# Altium PCB RaspberryPi3_Cape_V1.0.PcbDoc
Units mm, origin at the board's own origin, x right, y up, seen from the top; angles counter-clockwise.
Board outline 69.63 x 45.49 mm, 2 copper layers (Top Layer, Bottom Layer); 67 components, 48 nets, 217 pads, 36 vias.
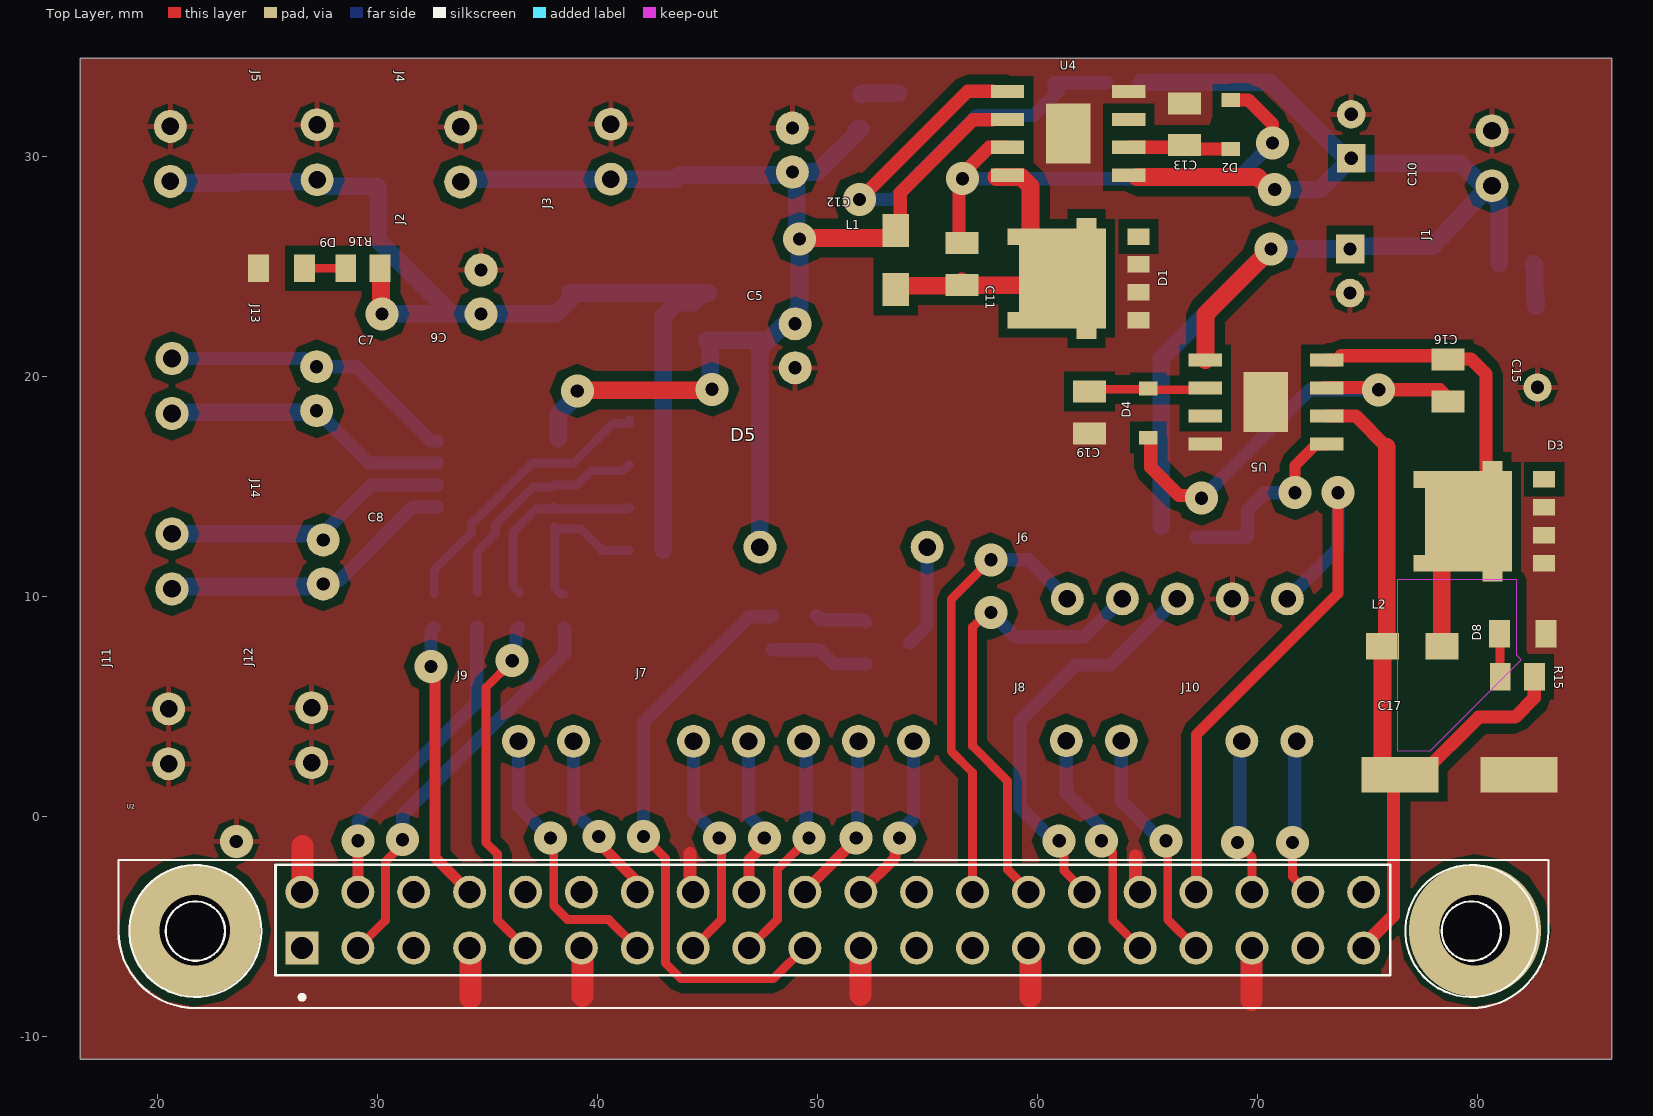
[diagram p0: Top Layer view]
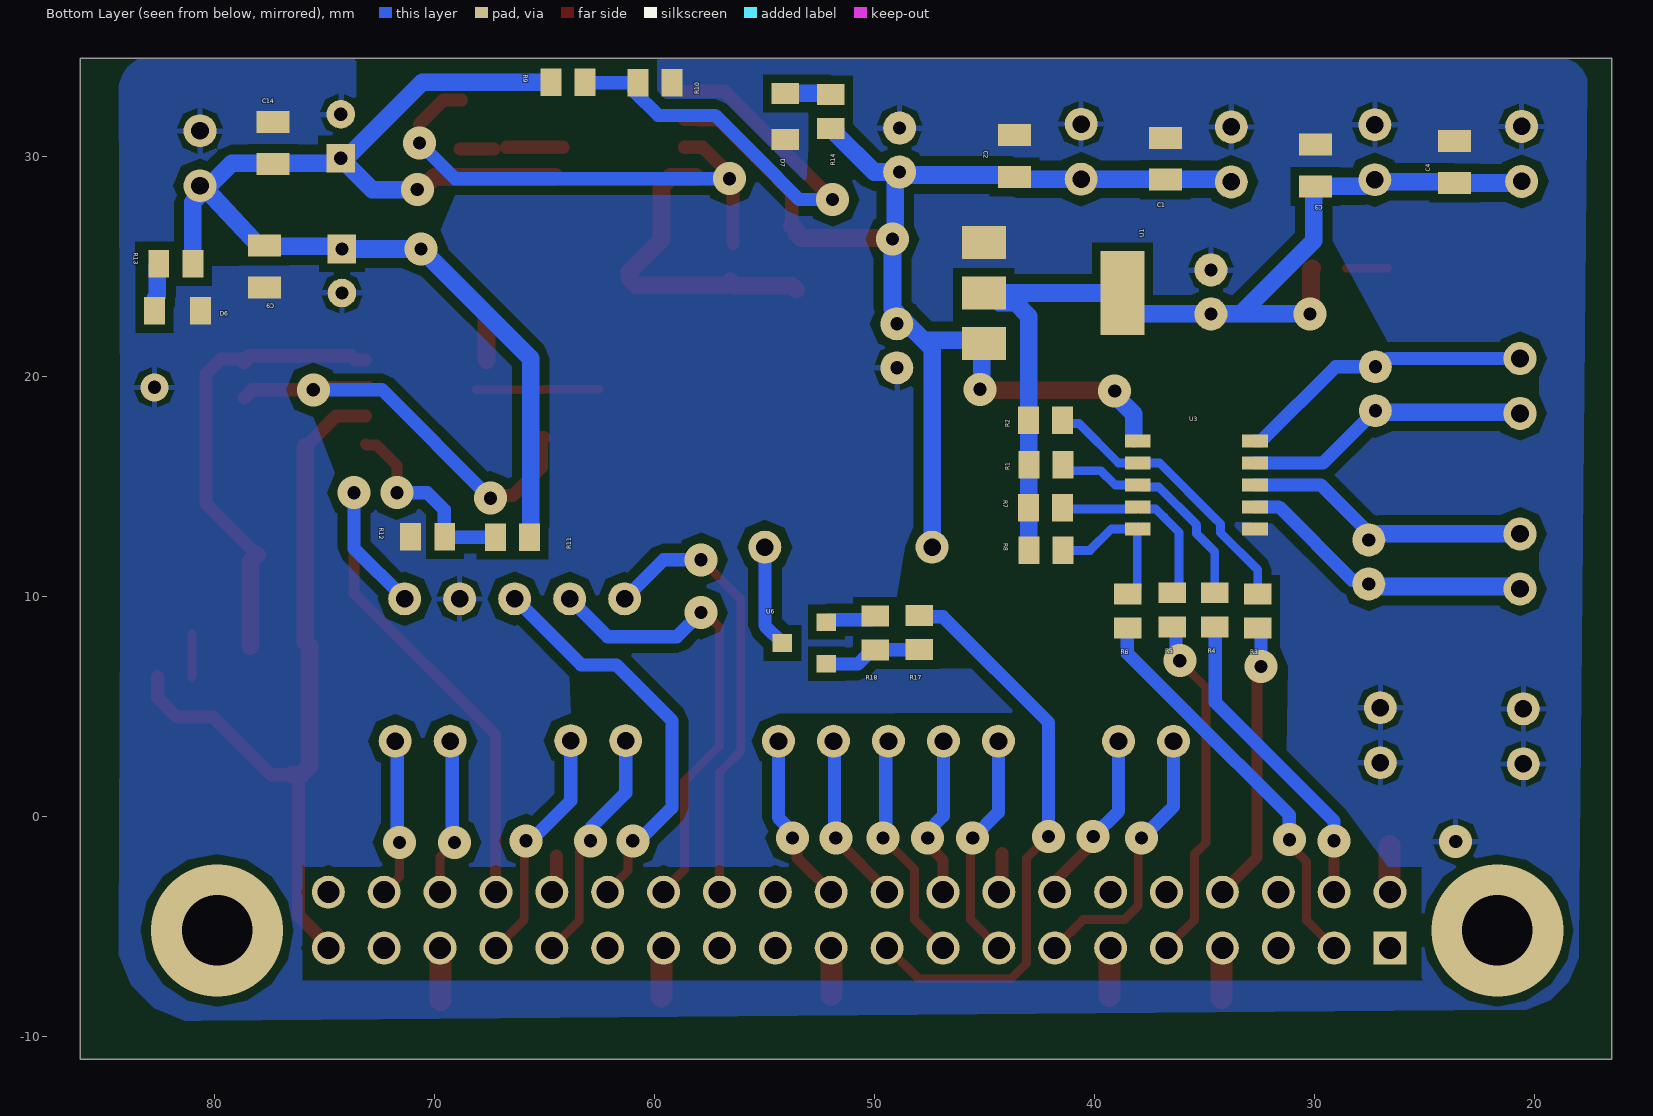
[diagram p1: Bottom Layer view, seen from below]
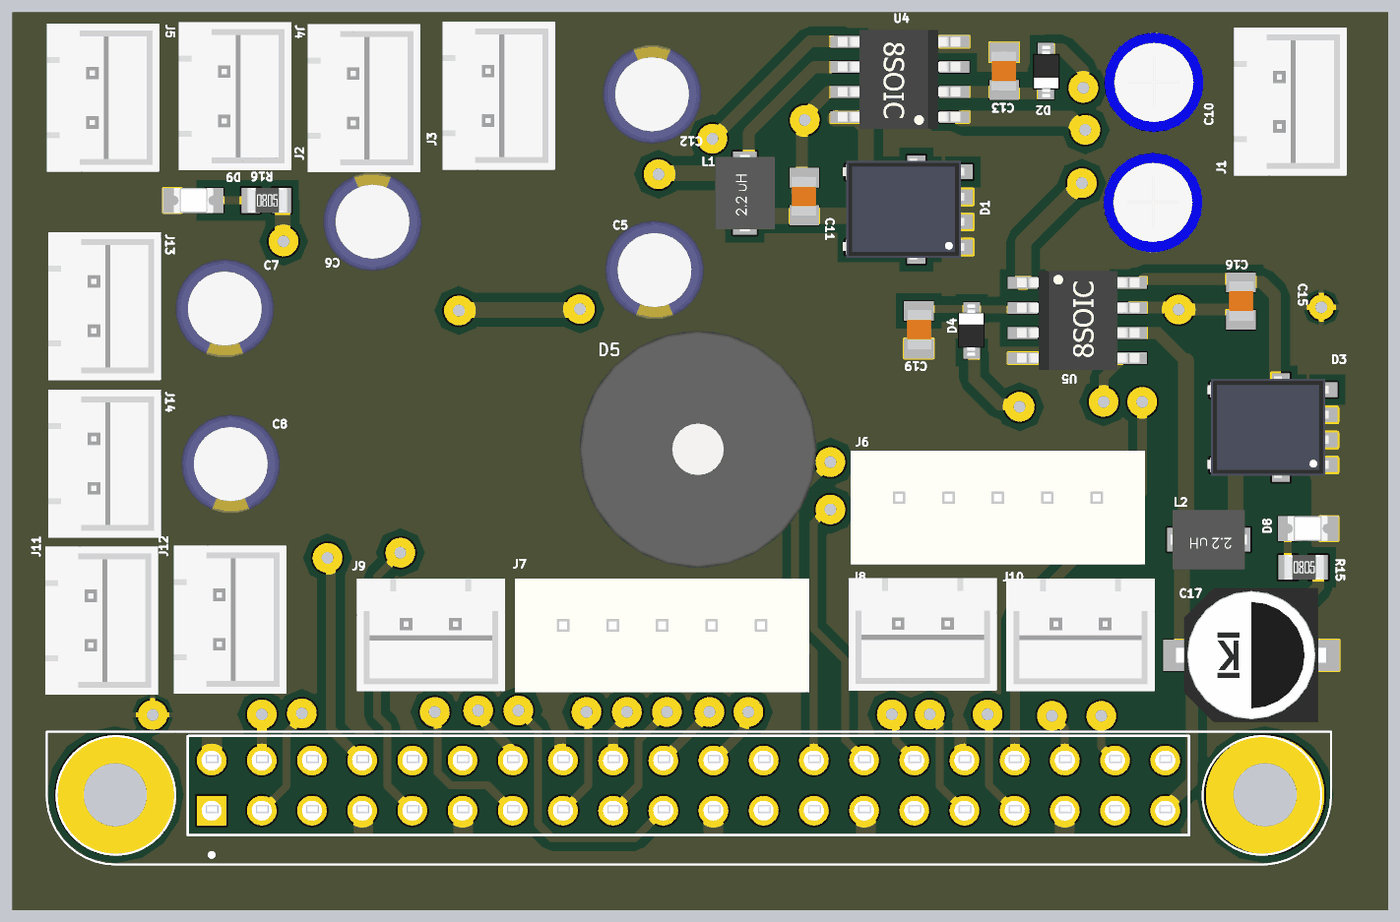
[diagram p2: 3D render of the assembled board from above, using the file's embedded part models]
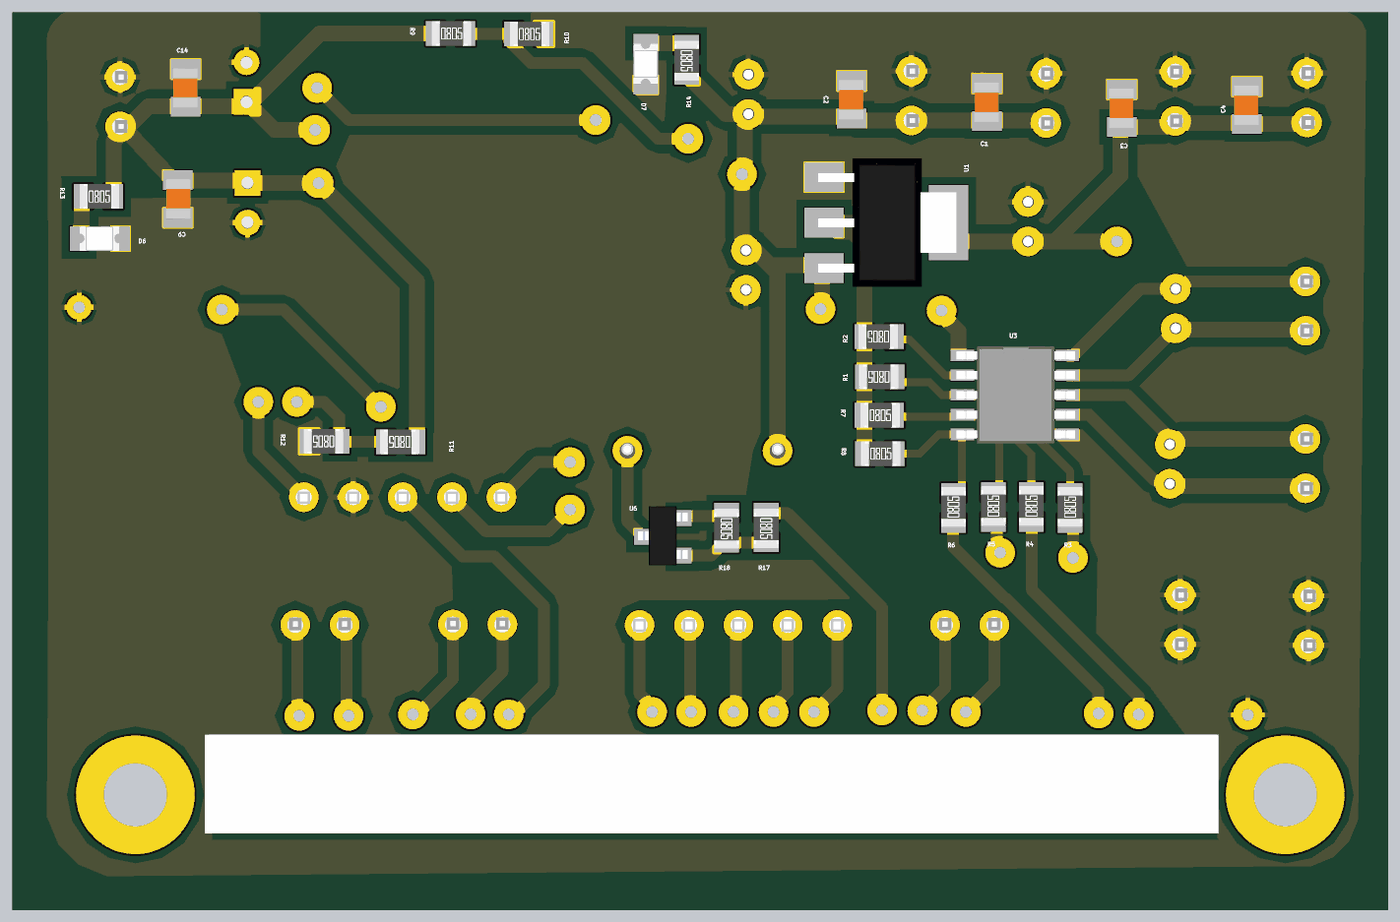
[diagram p3: 3D render of the assembled board from below, using the file's embedded part models]

## Layer stack, top to bottom
Top Solder: solder mask 0.0102, Solder Resist, Dk 3.5
Top Layer: signal copper 0.0356
Dielectric 1: dielectric 0.32, FR-4, Dk 4.8
Bottom Layer: signal copper 0.0356
Bottom Solder: solder mask 0.0102, Solder Resist, Dk 3.5

## Board outline
16.5,-11.05 16.5,34.439 25.239,34.439 86.125,34.439 86.125,-11.05

## Design rules (kind name [scope] priority, off if disabled: settings)
Clearance [All] p1: gap=0.4 ignorepadtopadclearanceinfootprint=FALSE except(0.2: Arc-Hole Track-Hole; 0.3: Arc-THPad Track-THPad)
PolygonConnect [All] p1: connectstyle=Relief reliefconductorwidth=0.254 reliefentries=4 polygonreliefangle="90 Angle" airgapwidth=0.254
RoutingVias [All] p1: holewidth=0.6 width=1.5 viastyle="Through Hole" minholewidth=0.6 minwidth=0.8 maxholewidth=10 maxwidth=10
SolderMaskExpansion [All] p1: expansion=0.102 istentingtop=FALSE
Width [All] p1: maxlimit=1 minlimit=0.254 preferedwidth=0.4 minimp=50.000000 maximp=50.000000 favimp=50.000000
30 further rules are at their usual default settings.

## Components (designator, comment, footprint, x,y, rotation, side; value= is the part's Value field where it differs from the comment)
C1 "470nF" CAP_0805 36.8,30.675 r270 bottom
C2 "470nF" CAP_0805 43.65,30.8 r270 bottom
C3 "470nF" CAP_0805 29.975,30.375 r270 bottom
C4 "470nF" CAP_0805 23.65,30.525 r270 bottom
C5 "10uF" CAP_POL_P-1.5MM 49,22.375 r270 top
C6 "10uF" CAP_POL_P-1.5MM 34.725,22.825 r90 top
C7 "100uF" CAP_POL_P-2MM 27.25,20.425 r270 top
C8 "100uF" CAP_POL_P-2MM 27.55,12.55 r270 top
C9 "1uF" CAP_0805 77.75,24.175 r90 bottom
C10 "10uF" CP_RADIAL_D5MM_L11MM_P2MM 74.275,30.9 r90 top
C11 "100nF" CAP_0805 56.575,25.9 r270 top
C12 "33uF" CAP_POL_P-2MM 48.875,29.275 r90 top
C13 "100nF" CAP_0805 66.7,32.25 r270 top
C14 "1uF" CAP_0805 77.35,31.4 r270 bottom
C15 "10uF" CP_RADIAL_D5MM_L11MM_P2MM 74.225,24.775 r270 top
C16 "100nF" CAP_0805 78.675,19 r90 top
C17 "33uF" SMD_ELECTROLYTIC_6.3X5.2 76,-1.425 r0 top
C19 "100nF" CAP_0805 62.375,17.55 r90 top
D1 "Schottky Diode" "SCHOTTY DIODE" 64.6,22.535 r90 top
D2 "Diode" SOD323 68.8,30.325 r90 top
D3 "Schottky Diode" "SCHOTTY DIODE" 83.05,11.5 r90 top
D4 "Diode" SOD323 65.05,19.43 r270 top
D5 "Buzzer" BUZZER 51.2,12.225 r0 top
D6 "LED" LED_0805 82.75,22.975 r180 bottom
D7 "LED" LED_0805 54.075,32.85 r270 bottom
D8 "LED" LED_0805 81.027,8.284 r0 top
D9 "LED" LED_0805 26.7,24.9 r180 top
J1 "JST_1x2_2.54mm" JST_1X2_B2B_XH-A 80.675,31.15 r270 top
J2 "JST_1x2_2.54mm" JST_1X2_B2B_XH-A 33.8,31.325 r270 top
J3 "JST_1x2_2.54mm" JST_1X2_B2B_XH-A 40.625,31.45 r270 top
J4 "JST_1x2_2.54mm" JST_1X2_B2B_XH-A 27.275,31.425 r270 top
J5 "JST_1x2_2.54mm" JST_1X2_B2B_XH-A 20.6,31.35 r270 top
J6 "JST_1x2_2.54mm" JST_1X2_B2B_XH-A 63.825,3.425 r180 top
J7 "JST_1x5_2.54mm" JST_1X5_B2B_XH-A 54.383,3.403 r180 top
J8 "JST_1x5_2.54mm" JST_1X5_B2B_XH-A 71.375,9.875 r180 top
J9 "JST_1x2_2.54mm" JST_1X2_B2B_XH-A 38.925,3.4 r180 top
J10 "JST_1x2_2.54mm" JST_1X2_B2B_XH-A 71.807,3.403 r180 top
J11 "JST_1x2_2.54mm" JST_1X2_B2B_XH-A 20.525,4.875 r270 top
J12 "JST_1x2_2.54mm" JST_1X2_B2B_XH-A 27.025,4.925 r270 top
J13 "JST_1x2_2.54mm" JST_1X2_B2B_XH-A 20.675,20.8 r270 top
J14 "JST_1x2_2.54mm" JST_1X2_B2B_XH-A 20.675,12.825 r270 top
L1 "2.2uH" INDUCTOR 53.575,25.275 r90 top
L2 "2.2uH" INDUCTOR 77.05,7.725 r180 top
R1 "10K Ohm" RES_0805_2012 41.45,15.975 r0 bottom
R2 "10K Ohm" RES_0805_2012 41.475,18 r0 bottom
R3 "4.7 Ohm" RES_0805_2012 32.6,8.55 r90 bottom
R4 "4.7 Ohm" RES_0805_2012 34.55,8.6 r90 bottom
R5 "4.7 Ohm" RES_0805_2012 36.475,8.6 r90 bottom
R6 "4.7 Ohm" RES_0805_2012 38.5,8.55 r90 bottom
R7 "10K Ohm" RES_0805_2012 43.025,14.025 r180 bottom
R8 "10K Ohm" RES_0805_2012 43,12.075 r180 bottom
R9 "2K Ohm" RES_0805_2012 64.725,33.35 r180 bottom
R10 "2K Ohm" RES_0805_2012 60.775,33.325 r180 bottom
R11 "2K Ohm" RES_0805_2012 65.7,12.675 r0 bottom
R12 "2K Ohm" RES_0805_2012 69.55,12.7 r0 bottom
R13 "1K Ohm" RES_0805_2012 82.55,25.1 r180 bottom
R14 "1K Ohm" RES_0805_2012 52,32.8 r270 bottom
R15 "1K Ohm" RES_0805_2012 81.05,6.325 r0 top
R16 "1K Ohm" RES_0805_2012 28.575,24.9 r0 top
R17 "1K Ohm" RES_0805_2012 47.974,9.118 r270 bottom
R18 "1K Ohm" RES_0805_2012 49.978,9.103 r270 bottom
U1 "AMS1117_3.3V" SOT223_AMS 45.05,26.075 r270 bottom
U2 "RaspberryPi_3" "RASPBERRY PI 3 MODELB" 79.784,-5.297 r180 top
U3 "LV8548" SOIC10 38.05,17.05 r270 bottom
U4 "NCV891330" SOIC8 64.176,29.13 r90 top
U5 "NCV891330" SOIC8 67.639,20.73 r270 top
U6 "MOSFET_N-Channel" SOT23 52.207,6.918 r90 bottom

## Footprints (in the part's own frame and the unit in brackets; to place one, negate y for a bottom-side part, rotate by r counter-clockwise, add the part's x,y. Pads: shape width x height; smd on the part's side, far side on the other; paste and mask are expansions set on the pad)
BUZZER [mm]
  round 1.5 hole 0.8: 1(-3.8,0) 2(3.8,0)
  body extent -6,-5.92 6,6.07, height 9.56
CAP_0805 [mm]
  rect 1x1.5 smd mask+0.05: 1(-0.15,0) 2(1.75,0)
  body extent -0.2,-0.65 1.8,0.6, height 0.8
CAP_POL_P-1.5MM [mm]
  round 1.5 hole 0.6 mask+0.05: 1(0,0) 2(2,0)
  body extent -1.5,-2.5 3.5,2.5, height 11
CAP_POL_P-2MM [mm]
  round 1.5 hole 0.6 mask+0.05: 1(0,0) 2(2,0)
  body extent -1.5,-2.5 3.5,2.5, height 11
CP_RADIAL_D5MM_L11MM_P2MM [mm]
  rect 1.3x1.3 hole 0.6: 1(-1,0)
  round 1.3 hole 0.6: 2(1,0)
  body extent -2.55,-2.53 2.5,2.53, height 11.03
INDUCTOR [mm]
  rect 1.5x1.2 smd: 1(-1.35,0) 2(1.35,0)
  body extent -1.92,-1.5 1.92,1.5, height 2
JST_1X2_B2B_XH-A [mm] "JST_B2B_XH-A1x2 PCB Header"
  round 1.5 hole 0.8 mask+0.05: 1(0,0) 2(2.5,0)
  body extent -2.5,-2.35 5,3.35, height 7
JST_1X5_B2B_XH-A [mm]
  round 1.5 hole 0.8 mask+0.05: 1(0,0) 2(2.5,0) 3(5,0) 4(7.5,0) 5(10,0)
  body extent -2.45,-2.35 12.45,3.4, height 7.5
LED_0805 [mm]
  rect 0.95x1.25 smd mask+0.05: 1(0,0) 2(2.1,0)
  body extent 0.03,-0.62 2.03,0.63, height 0.78
"RASPBERRY PI 3 MODELB" [mm]
  round 1.5 hole 1: 1(4.94,-1.84) 2(4.94,0.7) 3(7.48,-1.84) 4(7.48,0.7) 5(10.02,-1.84) 6(10.02,0.7) 7(12.56,-1.84) 8(12.56,0.7) 9(15.1,-1.84) 10(15.1,0.7) 11(17.64,-1.84) 12(17.64,0.7) 13(20.18,-1.84) 14(20.18,0.7) 15(22.72,-1.84) 16(22.72,0.7) 17(25.26,-1.84) 18(25.26,0.7) 19(27.8,-1.84) 20(27.8,0.7) 21(30.34,-1.84) 22(30.34,0.7) 23(32.88,-1.84) 24(32.88,0.7) 25(35.42,-1.84) 26(35.42,0.7) 27(37.96,-1.84) 28(37.96,0.7) 29(40.5,-1.84) 30(40.5,0.7) 31(43.04,-1.84) 32(43.04,0.7) 33(45.58,-1.84) 34(45.58,0.7) 35(48.12,-1.84) 36(48.12,0.7) 37(50.66,-1.84) 38(50.66,0.7) 39(53.2,-1.84)
  rect 1.5x1.5 hole 1: 40(53.2,0.7)
  silkscreen extent -3.45,-3.3 61.55,3.43, body extent 3.4,-3.14 54.7,1.86, height 3.08
RES_0805_2012 [mm]
  rect 0.95x1.25 smd: 1(0,0) 2(1.55,0)
  body extent -0.17,-0.62 1.83,0.63, height 0.6
"SCHOTTY DIODE" [mm]
  rect 0.75x1 smd: 1(0,0) 1(1.27,0) 1(2.54,0) 4(3.81,0)
  rect 0.495x0.905 smd: 2(-0.6,2.35) 2(4.4,2.35)
  rect 0.75x0.575 smd: 2(0,5.65)
  rect 4.56x3.955 smd: 2(1.905,3.443)
  rect 0.77x0.575 smd: 2(3.8,5.65)
  body extent -0.65,-0.07 4.5,6.07, height 1.13
SMD_ELECTROLYTIC_6.3X5.2 [mm]
  rect 3.5x1.6 smd mask+0.05: 1(0.5,3.3) 2(5.9,3.3)
  body extent -0.6,-0.1 7,6.7, height 5.62
SOD323 [mm]
  rect 0.63x0.83 smd mask+0.05: 1(0,0) 2(2.23,0)
  body extent -0.2,-0.7 2.4,0.65, height 1.1
SOIC8 [mm]
  rect 0.6x1.52 smd mask+0.05: 1(0,0.001) 2(1.27,0.001) 3(2.54,0.001) 4(3.81,0.001) 5(3.81,5.521) 6(2.54,5.521) 7(1.27,5.521) 8(0,5.521)
  rect 2.72x2.03 smd mask+0.05: 4(1.905,2.761)
  body extent -0.6,-0.3 4.4,5.9, height 1.95
SOIC10 [mm]
  rect 0.58x1.18 smd mask+0.05: 1(0,0) 2(1,0) 3(2,0) 4(3,0) 5(4,0) 6(4,5.32) 7(3,5.32) 8(2,5.32) 9(1,5.32) 10(0,5.32)
  body extent -0.45,-0.3 4.45,5.7, height 1.75
SOT23 [mm]
  rect 0.8x0.9 smd mask+0.05: 1(0,0) 2(1.9,0) 3(0.95,2)
  body extent -0.5,-0.25 2.5,2.25, height 1.1
SOT223_AMS [mm]
  rect 1.5x2 smd mask+0.05: 1(0,0) 2(2.3,0) 3(4.6,0)
  rect 3.8x2 smd mask+0.05: 4(2.3,6.3)
  body extent -0.95,-0.3 5.55,6.7, height 1.85

## Part data
C1 C2 C3 C4 C9 C11 C13 C14 C16 C19: library part CAP_0805, "0805 Package SMD Capacitor"
C5 C6: library part Cap_Polarized_1.5mm
C7 C8 C12: library part Cap_Polarized, "Polarized Capacitor 2.5mm pitch"
C10 C15: library part Cap_Pol_4x6, "4x6 Radial Polarized Capacitor"
C17: library part CAP_SMD_Electrolytic_6.3x5.4
D1 D3: "1A,60V Schottky Diode"
D2 D4: "SOD323 Package Diode."
D6 D7 D8 D9: library part LED_0805_2012, "0805 Package SMD Led"
J1 J2 J3 J4 J5 J6 J9 J10 J11 J12 J13 J14: "JST_1x2_2.54mm PCB Header"
J7 J8: "JST_1x5_2.54mm PCB Header"
L1 L2: library part Inductor
R1 R2 R3 R4 R5 R6 R7 R8 R9 R10 R11 R12 R13 R14 R15 R16 R17 R18: library part RES_0805_2012, "0805 Package SMD Resistor"
U1: "Linear Regulator.         3.3V,1A Output.                        SOT-223 Package."
U2: "RaspberryPi 3+ Model B."
U3: "2-Channel Motor Driver.           SOIC-10 Package."
U4 U5: "Switching Regulator.            5V, Max 3A Output.                         SOIC-8 Package."
U6: "500mA,60V N-Channel Mosfet."

## Via types
v1: diameter 1.5, hole 0.6, Top Layer to Bottom Layer, 33 vias
v2: diameter 6, hole 3.2, Top Layer to Bottom Layer, 2 vias
v3: diameter 1.27, hole 0.6, Top Layer to Bottom Layer, 1 vias

## Nets (pads, with @x,y where several pads share a name; then routed paths per layer and width w, separated by ;. In a path a pad name is that pad's centre, name@x,y a point inside that pad or via, vN(x,y) a via of type N, cw(c..) or ccw(c..) an arc to the next point about the centre after c; other vN are vias at no path point)
3.3V_1: C3.2 C4.2 C6.1 J4.2 J5.2 R1.2 R2.2 R7.1 R8.1 R16.2 U1.2 U1.4 | length 47.2
  Top Layer w0.8: R16.2 30.175,24.85 30.175,22.875 v1(30.225,22.825)
  Bottom Layer w0.8: J5.2 20.675,28.775 C4.2 23.7,28.825 27.175,28.825 J4.2 27.464,28.925 27.764,28.625 C3.2 30.05,28.55 30.05,26.15 33.375,22.825 ; v1(30.225,22.825) 33.375,22.825 ; R8.1 43,14.025 R1.2 43,18 43,22.724 43.601,23.325 44.35,23.325 U1.2@44.8,23.775 ; U1.2 U1.2@44.8,23.775 ; 33.375,22.825 C6.1 38.15,22.825 38.75,23.425 U1.4 U1.2@44.8,23.775
11.1V: C9.2 C10.1 C14.2 C15.1 J1.2 R9.1 R11.1 R13.2 U4.1 U5.1 | length 63.3
  Top Layer w0.8: U4.1@64.535,29.05 70.036,29.05 70.611,28.475 v1(70.8,28.475) ; U5.1 67.655,20.73 67.655,22.805 v1(70.625,25.775)
  Bottom Layer w0.8: R9.1 70.575,33.35 74.025,29.9 C10.1 ; R11.1@65.65,13.175 65.65,20.8 v1(70.625,25.775) C15.1 74.35,25.9 77.725,25.9 C9.2 ; v1(70.8,28.475) 72.85,28.475 C10.1 ; C9.2@77.979,25.896 J1.2@80.1,28.175 ; R13.2 81,27.9 80.463,28.437 80.463,28.673 80.352,28.784 80.116,28.784 79.225,29.675 74.5,29.675 C10.1
BST_1: C11.1 D2.2 U4.7 | length 23.8
  Top Layer w0.6: C11.1@56.45,26.025 56.45,28.819 v1(56.602,28.971) ; v1@56.5,29.075 57.825,30.4 U4.7 ; D2.2 69.595,32.555 70.7,31.45 v1(70.7,30.6)
  Bottom Layer w0.6: v1(56.602,28.971) 69.071,28.971 70.55,30.45 v1@70.85,30.45
BST_2: C16.1 D4.2 U5.7 | length 20.3
  Top Layer w0.6: D4.2 65.15,17.2 65.165,17.185 65.165,15.86 66.458,14.567 67.358,14.567 v1(67.475,14.45) ; U5.7@73.025,19.475 75.425,19.475 v1(75.525,19.375) 78.3,19.375 C16.1@78.675,19
  Bottom Layer w0.6: v1(67.475,14.45) 72.4,19.375 v1(75.525,19.375)
DRV_1: C13.2 D2.1 U4.2 | length 4.1
  Top Layer w0.6: U4.2 C13.2@66.75,30.4 ; C13.2@67.325,30.325 D2.1 D2.1@68.85,30.325
DRV_2: C19.2 D4.1 U5.2 | length 5.6
  Top Layer w0.4: C19.2@62.525,19.4 65.05,19.4 65.075,19.375 U5.2@68.13,19.375
GND: C1.1 C2.1 C3.1 C4.1 C5.2 C6.2 C9.1 C10.2 C12.2 C13.1 C14.1 C15.2 C17.2 C19.1 D1.1 D3.1 D6.2 D7.2 D8.2 D9.2 J1.1 J2.1 J3.1 J4.1 J5.1 J8.2 J11.1 J11.2 J12.1 J12.2 R10.2 R12.2 U1.1 U2.6 U2.9 U2.14 U2.20 U2.25 U2.30 U2.34 U2.39 U3.6 U4.4 U5.4 | length 16.9
  Top Layer w0.4: U2.20@51.975,-6.005 U2.20 ; U2.14 U2.14@59.7,-6.093 ; U2.6@69.75,-6.01 U2.6
  Top Layer w0.6: 44.225,-1.697 44.225,-3.318 U2.25 ; 64.475,-1.825 64.475,-3.248 U2.9 U2.9@64.632,-3.457
  Top Layer w1: U2.39 26.6,-3.44 26.6,-1.364 ; U2.34 34.25,-6.043 34.25,-8.28 ; U2.30 39.325,-6.038 39.325,-8.179 ; 51.975,-8.125 U2.20@51.975,-6.005 ; 59.7,-8.2 U2.14@59.7,-6.093 ; 69.75,-8.35 U2.6@69.75,-6.01
  other v1: 23.6,-1.15
  other v3: 82.748,19.49
GPIO4: J8.1 U2.7 | length 26.7
  Top Layer w0.5: U2.7 67.254,-3.426 67.254,3.704 73.679,10.129 v1(73.679,14.7) v1@73.679,14.801
  Bottom Layer w0.6: J8.1 73.679,12.179 v1(73.679,14.7)
GPIO17: J8.3 U2.11 | length 18.6
  Top Layer w0.4: v1@61.005,-1.197 61.216,-1.407 61.216,-2.475 62.144,-3.403 U2.11
  Bottom Layer w0.6: v1@61.005,-1.197 60.797,-1.197 59.225,0.375 59.225,4.35 61.746,6.871 63.346,6.871 66.35,9.875 J8.3
  other v1: 61.005,-1.125
GPIO20: R4.1 U2.37 | length 14.4
  Top Layer w0.4: U2.37@29.125,-3.455 U2.37 U2.37@29.165,-3.415
  Top Layer w0.5: U2.37@29.125,-3.455 v1(29.125,-1.125)
  Bottom Layer w0.6: v1(29.125,-1.125) 29.125,-0.225 34.525,5.175 34.525,8.575 R4.1
GPIO22: J8.5 U2.15 | length 20.5
  Top Layer w0.4: U2.15 57.064,1.979 56.1,2.943 56.1,9.85 v1(57.9,11.65)
  Bottom Layer w0.6: v1(57.9,11.65) 59.6,11.65 J8.5
GPIO25: R17.1 U2.22 | length 26.9
  Top Layer w0.4: v1@42.107,-1.334 v1@42.107,-1.197 ; v1(42.107,-0.925) 43.107,-1.925 43.107,-6.689 43.815,-7.397 48.007,-7.397 49.407,-5.997 U2.22
  Bottom Layer w0.6: v1@42.107,-1.197 v1(42.107,-0.925) 42.107,4.257 46.908,9.058 47.914,9.058 R17.1
GPIO26: R6.1 U2.38 | length 18.5
  Top Layer w0.4: U2.38 30.375,-4.745 30.375,-2.075 31.15,-1.3 v1(31.15,-1.075)
  Bottom Layer w0.6: v1(31.15,-1.075) 31.167,-1.058 31.167,0.051 35.866,4.75 35.875,4.75 38.525,7.4 38.525,8.375 38.5,8.4 R6.1
GPIO27: J8.4 U2.13 | length 21.2
  Top Layer w0.4: v1@57.725,9.25 57.064,8.589 57.064,3.188 58.65,1.602 58.65,-2.422 59.604,-3.376 U2.13
  Bottom Layer w0.6: v1(57.9,9.25) 59,8.15 62.15,8.15 J8.4
I2C0_SCL: J9.2 U2.28 | length 12.9
  Top Layer w0.4: v1(37.875,-1) 38.025,-1.15 38.025,-4.075 38.657,-4.707 40.534,-4.707 U2.28
  Bottom Layer w0.6: J9.2@36.225,3.3 J9.2@36.242,3.283 ; J9.2@36.342,3.317 J9.2 36.425,0.45 v1(37.875,-1)
I2C0_SDA: J9.1 U2.27 | length 8.1
  Top Layer w0.5: v1(40.075,-0.925) 40.075,-1.225 41.824,-2.974 U2.27
  Bottom Layer w0.6: J9.1 38.925,0.225 v1(40.075,-0.925)
I2C1_SCL: J10.2 U2.5 | length 7.2
  Top Layer w0.4: v1(69.107,-1.197) 69.764,-1.853 U2.5
  Bottom Layer w0.6: v1(69.107,-1.197) 69.207,-1.097 69.207,3.303 J10.2
I2C1_SDA: J10.1 U2.3 | length 7.2
  Top Layer w0.4: v1(71.607,-1.197) 71.607,-2.76 U2.3
  Bottom Layer w0.6: v1(71.607,-1.197) 71.707,-1.097 71.707,3.303 J10.1
NetC7_1: C7.1 J13.1 U3.10 | length 13.6
  Bottom Layer w0.6: J13.1 26.686,20.8 27.061,20.425 C7.1 29.055,20.425 32.43,17.05 U3.10
NetC7_2: C7.2 J13.2 U3.9 | length 13.1
  Bottom Layer w0.6: C7.2 29.625,16.05 U3.9
  Bottom Layer w0.8: J13.2 20.737,18.362 27.187,18.362 C7.2
NetC8_1: C8.1 J14.1 U3.8 | length 13.4
  Bottom Layer w0.6: C8.1 27.55,12.875 29.725,15.05 U3.8
  Bottom Layer w0.8: J14.1 27.086,12.825 27.361,12.55 C8.1
NetC8_2: C8.2 J14.2 U3.7 | length 13.6
  Bottom Layer w0.6: C8.2 27.722,10.722 28.297,10.722 31.625,14.05 U3.7
  Bottom Layer w0.8: J14.2 20.787,10.438 27.438,10.438 C8.2
NetC11_2: C11.2 D1.2 L1.1 U4.8 | length 14.5
  Top Layer w0.8: L1.1 53.763,24.112 56.387,24.112 56.575,24.3 56.75,24.125 60.842,24.125 61.158,24.44 61.158,24.742 59.7,26.2 59.7,28.625 59.275,29.05 U4.8@58.15,29.05
NetC16_2: C16.2 D3.2 L2.1 U5.8 | length 21.4
  Top Layer w0.6: U5.8 73.62,20.73 73.815,20.925 78.5,20.925 C16.2 ; D3.2@78.075,11.872 79.608,13.405 80.4,14.197 80.4,15.9 80.4,20.1 79.725,20.775 78.85,20.775 78.675,20.6 C16.2@78.545,20.73
  Top Layer w0.8: D3.2@78.075,11.872 78.4,11.547 L2.1
NetD5_2: D5.2 U6.3 | length 4.7
  Bottom Layer w0.6: U6.3 55,8.661 D5.2
NetD6_1: D6.1 R13.1 | length 2
  Bottom Layer w0.8: R13.1 82.625,25.025 82.625,24.491 82.625,23.634 82.675,23.584 D6.1@82.675,23.2
NetD7_1: D7.1 R14.1 | length 1.7
  Bottom Layer w0.8: R14.1 52.05,32.85 D7.1@53.7,32.85
NetD8_1: D8.1 R15.1 | length 2
  Top Layer w0.4: D8.1 81.038,8.272 81.038,6.337 R15.1
NetD9_1: D9.1 R16.1 | length 1.9
  Top Layer w0.4: D9.1 R16.1
NetR1_1: R1.1 R4.2 U3.3 | length 10.6
  Bottom Layer w0.4: R4.2 34.55,12.01 35.375,12.835 35.375,13.235 37.1,14.96 37.96,14.96 U3.3 39.075,15.05 39.725,15.7 41.175,15.7 R1.1
NetR2_1: R2.1 R3.2 U3.2 | length 13.1
  Bottom Layer w0.4: R3.2 32.6,11.191 34.291,12.882 34.291,13.282 34.575,13.566 37.059,16.05 U3.2 38.925,16.05 40.725,17.85 41.475,17.85 R2.1
NetR5_2: R5.2 R7.2 U3.4 | length 8.7
  Bottom Layer w0.4: R5.2 36.175,10.45 36.175,12.9 36.86,13.585 36.86,13.589 37.231,13.96 37.96,13.96 U3.4 38.14,13.96 41.41,13.96 R7.2
NetR6_2: R6.2 R8.2 U3.5 | length 7.1
  Bottom Layer w0.4: U3.5 38.075,13.025 38.075,10.375 38.35,10.1 R6.2 ; U3.5@38.05,13.14 38.14,13.05 39.25,13.05 40.225,12.075 R8.2
NetR9_2: R9.2 R10.1 U4.5 | length 22.7
  Top Layer w0.6: v1(51.925,28.025) 56.85,32.95 58.009,32.95 58.019,32.94 U4.5
  Bottom Layer w0.6: v1(51.925,28.025) 53.44,28.025 55.4,29.985 57.265,31.85 59.85,31.85 60.975,32.975 60.775,33.175 R10.1 60.787,33.337 63.163,33.337 R9.2
NetR11_2: R11.2 R12.1 U5.5 | length 9.1
  Top Layer w0.5: v1(71.725,14.7) 71.725,15.945 72.6,16.82 72.65,16.87 73.11,16.87 U5.5
  Bottom Layer w0.6: R11.2 69.525,12.675 R12.1 69.575,12.725 69.575,13.925 70.35,14.7 v1(71.725,14.7)
NetR17_2: R17.2 R18.2 U6.1 | length 4.5
  Bottom Layer w0.6: R17.2 47.981,7.561 49.971,7.561 R18.2 50.128,7.553 50.764,6.918 U6.1
NetR18_1: R18.1 U6.2 | length 2.3
  Bottom Layer w0.6: R18.1 50.153,8.928 50.651,8.928 50.655,8.925 51.706,8.925 51.713,8.918 52.107,8.918 U6.2
PWM0: R5.1 U2.32 | length 16
  Top Layer w0.4: v1(36.137,7.063) 36.137,7.031 34.95,5.844 34.95,-0.625 34.95,-1.204 35.475,-1.729 35.475,-4.728 U2.32
  Bottom Layer w0.6: v1(36.137,7.063) 36.306,7.232 36.306,8.478 R5.1@36.428,8.6
PWM1: R3.1 U2.33 | length 12.8
  Top Layer w0.5: v1(32.45,6.8) 32.625,6.625 32.625,-1.878 U2.33
  Bottom Layer w0.6: v1(32.45,6.8) 32.45,8.4 R3.1
SPI0_CE0: J7.3 U2.24 | length 10.6
  Top Layer w0.4: U2.24 48.194,-4.707 48.194,-2.431 v1(49.625,-1)
  Bottom Layer w0.6: J7.3 49.504,3.282 49.504,-0.879 v1(49.625,-1)
SPI0_CE1: J7.5 U2.26 | length 10.5
  Top Layer w0.4: U2.26 45.65,-4.71 45.65,-1.095 v1(45.555,-1)
  Bottom Layer w0.6: J7.5 44.383,0.173 v1(45.555,-1)
SPI0_MISO: J7.2 U2.21 | length 7.9
  Top Layer w0.5: U2.21 49.444,-3.394 51.775,-1.063 v1(51.775,-1)
  Bottom Layer w0.6: v1(51.775,-1) 51.829,-0.946 51.829,3.35 J7.2
SPI0_MOSI: J7.1 U2.19 | length 7.9
  Top Layer w0.5: U2.19 53.54,-1.901 53.54,-1.21 v1(53.75,-1)
  Bottom Layer w0.6: v1(53.75,-1) 53.75,-0.702 54.383,-0.07 J7.1
SPI0_SCLK: J7.4 U2.23 | length 7.4
  Top Layer w0.5: U2.23 46.904,-1.994 47.6,-1.298 v1(47.6,-1)
  Bottom Layer w0.6: J7.4 46.883,0.015 47.6,-0.702 v1(47.6,-1)
UART0_RX: J6.2 U2.10 | length 10.8
  Top Layer w0.4: v1(62.928,-1.125) 63.434,-1.631 63.434,-4.747 U2.10
  Bottom Layer w0.6: J6.2 61.325,1.05 62.928,-0.553 v1(62.928,-1.125)
UART0_TX: J6.1 U2.8 | length 10.8
  Top Layer w0.4: v1@65.854,-1.329 65.934,-1.409 65.934,-4.707 U2.8
  Bottom Layer w0.6: J6.1 63.825,0.7 v1@65.854,-1.329
  other v1: 65.854,-1.125
VOUT_1: C1.2 C2.2 C5.1 C12.1 D5.1 J2.2 J3.2 L1.2 R14.2 U1.3 U3.1 U4.6 | length 63.2
  Top Layer w0.6: L1.2@53.775,26.825 53.775,28.336 54.704,29.265 57.089,31.65 57.999,31.65 58.019,31.67 U4.6
  Top Layer w0.8: v1(39.1,19.325) 39.137,19.362 45.187,19.362 v1(45.225,19.4) ; v1(49.2,26.225) 49.25,26.275 53.375,26.275 53.575,26.475 L1.2 L1.2@53.775,26.825
  Bottom Layer w0.8: J2.2 33.925,28.95 36.925,28.95 J3.2 43.55,28.95 C2.2 ; U3.1@38.24,17.16 38.24,18.276 39.1,19.136 v1(39.1,19.325) ; C2.2@43.809,29.141 48.741,29.141 C12.1 C12.1@49.025,29.125 ; U1.3@44.975,21.625 47.4,21.625 47.775,21.625 ; U1.3 45.137,21.387 45.137,19.487 v1(45.225,19.4) ; D5.1 47.4,21.25 47.775,21.625 ; R14.2 51.85,31.25 51.775,31.175 51.775,31.025 50.029,29.279 49.179,29.279 C12.1@49.025,29.125 ; 47.775,21.625 48.763,22.612 49.2,23.05 v1(49.2,26.225) 49.066,26.359 49.066,29.084 C12.1@49.025,29.125
VOUT_2: C17.1 L2.2 R15.2 U2.2 U5.6 | length 35.8
  Top Layer w0.6: U5.6 74.485,18.19 75.9,16.775 ; U2.2 74.844,-5.881 76.194,-4.531 76.194,-3.478 76.2,-3.471 76.2,1.852 C17.1@76.223,1.875 ; C17.1 77.45,1.875 80.075,4.5 81.725,4.5 82.6,5.375 R15.2
  Top Layer w0.8: 75.9,16.775 75.9,7.925 L2.2 75.7,2.275 76.1,1.875 76.223,1.875 C17.1
pads on no net: D1.4 D3.4 U2.1 U2.4 U2.12 U2.16 U2.17 U2.18 U2.29 U2.31 U2.35 U2.36 U2.40 U4.3 U5.3
copper on no net:
  other v2: 21.707,-5.197 79.9,-5.197

## Polygon pours and split planes (outlines as drawn)
GND on Bottom Layer "GND" (solid, pour order 0): 18.007,-5.841 17.607,33.296 cw(c18.877,33.182) 18.764,34.452 83.437,34.438 cw(c82.65,32.883) 84.38,33.1 ccw(c2204.997,13.775) 84.38,-5.55 cw(c80.618,-5.551) 80.618,-9.312 20.98,-8.814 cw(c20.98,-5.841)
GND on Top Layer "GND" (solid, remove dead copper, pour order 1): 16.5,-11.05 16.5,34.438 86.125,34.439 86.125,-11.05

## Keep-outs
Top Layer:
  region: 81.8,10.75 76.375,10.75 76.375,2.975 77.9,2.975 77.9,3 82,7.1 81.8,7.3
Bottom Layer:
  region: 83.425,26.125

## Other copper
Top Layer:
  pour cut-out: 55.45,5.15
  pour cut-out: 65.55,31.4 65.3,31.4 65.335,31.158 65.55,31.158
  pour cut-out: 67.85,31.4 67.85,31.083 68.953,31.04 69.615,31.04 69.755,31.324 69.281,31.797 68.697,31.84 67.985,31.84
  pour cut-out: 52.575,25.075 52.575,24.875 55.8,24.875 55.825,24.9 55.8,24.925 55.8,29.075 54.35,29.075 52.575,27.3
  pour cut-out: 25.3,-2.125 25.3,-7.175 75.65,-7.175 75.65,-1.75 75.275,-2.125
  pour cut-out: 25.3,-2.125
Bottom Layer:
  pour cut-out: 31.152,23.823 31.08,23.715 30.225,24.07 29.345,23.705 28.98,22.825 28.175,21.7 28.175,21.424 28.048,21.339 27.25,21.67 26.833,21.497 26.686,21.558 29.184,26.15
  pour cut-out: 58.831,10.892 58.161,10.513 58.161,10.386 58.78,10.13 59.094,9.128 59.314,8.908 60.416,8.908 60.478,9.035 60.181,9.997 59.286,10.892
  pour cut-out: 26.486,17.497
  pour cut-out: 48.645,12.225 48.999,9.993 46.949,9.816 46.373,9.594 41.35,4.257 39.805,4.28 38.925,4.645 37.122,4.762 37.078,4.881 39.061,6.864 39.283,7.675 39.525,10.975 40.575,11.238 46.52,11.345 47.4,10.98 48.28,11.345
  pour cut-out: 50.998,29.023 51.07,28.915 51.925,29.27 52.805,28.905 52.856,28.783 53.126,28.783 53.025,30.375 52.35,30.375
  pour cut-out: 65.699,34.442 65.622,34.343 65.663,34.216 70.575,34.216 71.187,33.962 73.186,31.964 73.335,31.994 73.583,32.592 73.575,34.425
  pour cut-out: 74.559,15.58 75.525,18.13 74.645,18.495 73.679,15.945
  pour cut-out: 68.669,14.572 68.355,13.57 68.356,13.433 68.675,13.433 68.817,13.725 69.814,15.236 70.794,15.458 71.725,15.945 72.638,15.5 72.765,15.5 73.679,15.945 74.645,18.495 74.594,18.617 72.714,18.617
  pour cut-out: 43.866,19.344 43.875,11.05 46.52,11.345 46.534,13.111 46.534,19.223 46.407,19.249 43.993,19.369
  pour cut-out: 35.343,3.007 35.219,3.031 32.03,-0.195 32.395,-1.075 32.03,-1.955 31.694,-2.094 31.703,-2.228 31.877,-2.3 37.677,-2.3 37.702,-2.173 36.681,-0.878 35.667,2.469
  pour cut-out: 70.626,3.25 70.489,3.25 70.188,2.523 69.965,2.431 69.988,-0.316 70.289,-1.043 70.426,-1.043 70.727,-0.316 70.95,-0.224 70.927,2.523
  pour cut-out: 63.881,6.335 63.825,4.67 62.644,3.578 62.506,3.578 62.205,4.305 61.411,4.634 61.367,4.753 62.059,6.113
  pour cut-out: 60.11,3.496 59.983,3.521 59.983,4.036 62.059,6.113 61.325,4.67
  pour cut-out: 62.644,3.272 62.506,3.272 62.205,2.545 62.083,2.494 62.083,1.364 63.06,0.387 63.167,0.459 63.067,0.7 63.067,2.494 62.945,2.545
  pour cut-out: 59.983,3.329 59.983,0.689 60.685,-0.013 61.005,0.12 61.08,0.224 60.789,0.514 60.567,1.05 60.567,2.494 60.445,2.545 60.11,3.354
  pour cut-out: 41.155,-0.22 41.028,-0.22 40.955,-0.045 40.075,0.32 39.953,0.269 39.683,0.539 39.683,2.469 39.805,2.52 40.17,3.4 39.805,4.28 41.35,4.257 41.35,0.006
  pour cut-out: 37.606,3.553 37.744,3.553 38.045,4.28 38.925,4.645 36.925,4.775 36.8,4.604 36.825,4.479 37.305,4.28
  pour cut-out: 37.744,3.247 37.606,3.247 37.183,2.469 37.183,0.764 37.753,0.194 38.065,0.166 38.167,0.261 38.167,2.469
  pour cut-out: 49.932,6.678 46.95,6.925 46.949,7.861 46.832,7.91 45.625,6.7
  pour cut-out: 43.502,4.284 44.383,4.648 45.564,3.557 45.701,3.557 46.002,4.284 46.883,4.648 47.763,4.284 48.064,3.557 48.201,3.557 48.502,4.284 49.383,4.648 50.263,4.284 50.564,3.557 50.701,3.557 51.002,4.284 51.883,4.648 52.763,4.284 53.064,3.557 53.201,3.557 53.502,4.284 54.383,4.648 43.575,4.7 43.35,4.45
  pour cut-out: 53.064,3.25 52.763,2.523 52.586,2.45 52.586,-0.091 52.699,-0.226 52.826,-0.226 53.538,0.157 53.625,0.244 53.625,2.473 53.201,3.25
  pour cut-out: 50.564,3.25 50.263,2.523 50.261,-0.019 50.637,-0.437 50.764,-0.437 51.071,-0.047 51.071,2.495 50.701,3.25
  pour cut-out: 48.064,3.25 47.64,2.473 47.64,0.329 47.812,0.157 48.549,-0.286 48.676,-0.286 48.746,-0.119 48.746,2.422 48.201,3.25
  pour cut-out: 45.564,3.25 45.14,2.473 45.14,0.486 45.433,0.194 45.998,0.061 46.125,0.146 46.125,2.473 45.701,3.25
  pour cut-out: 42.283,-2.3 45.357,-2.3 45.382,-2.173 44.675,-1.88 44.361,-0.878 43.625,0.173 43.625,2.473 43.502,4.284 43.35,4.45 42.865,3.944 42.865,0.006 43.352,-0.925 42.988,-1.805 42.207,-2.129
  pour cut-out: 38.927,-1.465 38.048,-2.173 38.073,-2.3 42.037,-2.3 42.107,-2.17 41.155,-1.63 39.054,-1.465
  pour cut-out: 28.589,0.311 26.66,-2.303 28.625,-2.3 28.65,-2.173 28.245,-2.005 27.88,-1.125 28.245,-0.245 28.383,-0.188
  pour cut-out: 33.767,6.643 33.64,6.669 33.33,5.92 32.45,5.555 31.57,5.92 31.205,6.8 31.275,2.975 33.767,5.489
  pour cut-out: 38.724,12.36 39.022,12.36 39.766,11.616 40.225,11.426 40.575,11.426 40.575,11.05 39.525,10.975 38.724,10.975
  pour cut-out: 83.425,26.125 83.65,26.125 83.625,24 83.491,24 83.425,25.184
  pour cut-out: 78.9,25.025 78.9,25.614 80.016,26.814 80.134,26.767 80.125,25
  pour cut-out: 69.071,28.213 69.577,28.423 70.701,27.271 70.732,27.148 70.625,27.02 69.745,26.655
  pour cut-out: 78.866,28.809 74.435,28.836 70.8,27.23 70.625,27.02 71.505,26.655 76.6,26.766 77.661,26.825 79.198,28.477
  pour cut-out: 57.579,31.092 56.753,30.267 56.778,30.142 57.533,29.728 68.757,29.728 69.506,30.478 70.683,31.838 70.738,31.962 70.216,32.484 62.3,32.58 61.65,32.58
  pour cut-out: 26.55,11.959 26.806,11.613 26.806,11.486 26.617,11.303 21.318,11.303 19.795,11.205 19.795,11.945 21.561,11.959
  pour cut-out: 26.164,20.042 26.506,19.489 26.506,19.362 26.338,19.228 21.439,19.228 19.795,19.18 19.795,19.92 21.606,20.042
  pour cut-out: 42.35,23.075 42.35,18.825 33.9,13.475 28.175,17.95 28.175,21.7 28.98,22.825 29.345,21.945 30.225,21.58 31.111,21.959 33.845,21.945 34.725,21.58 35.611,21.959 37.15,21.9 37.35,21.959 37.35,21.475 40.15,21.475 40.15,22.909
  pour cut-out: 42.097,22.909
  pour cut-out: 25.15,-2.3 25.15,-7.375 25.05,-7.475 76.025,-7.475 76.025,-2.175 75.9,-2.3

## Silkscreen, mask and mechanical layers (free items; w line width, h text height)
Mechanical 2:
  text "DEU DRONE 2020" at 32.2,12.925 h0.8
Board Outline:
  lines w1: 83.041,34.439 cw(c83.041,33.1) 84.38,33.1 84.38,-5.55 cw(c80.618,-5.55) 80.618,-9.312 20.964,-9.312 cw(c20.964,-5.971) 17.623,-5.971 17.623,33.311 cw(c18.75,33.311) 18.75,34.439 25.239,34.439 83.041,34.439 ; 83.041,34.439 83.041,34.439

## Text inside footprints (layer, text, board x,y; h text height)
D5: Mechanical 15 "-" at 54.756,9.685 h1.27; Mechanical 15 "+" at 46.882,9.939 h1.27